# EAGLE board Motor (EAGLE 7.2.0)
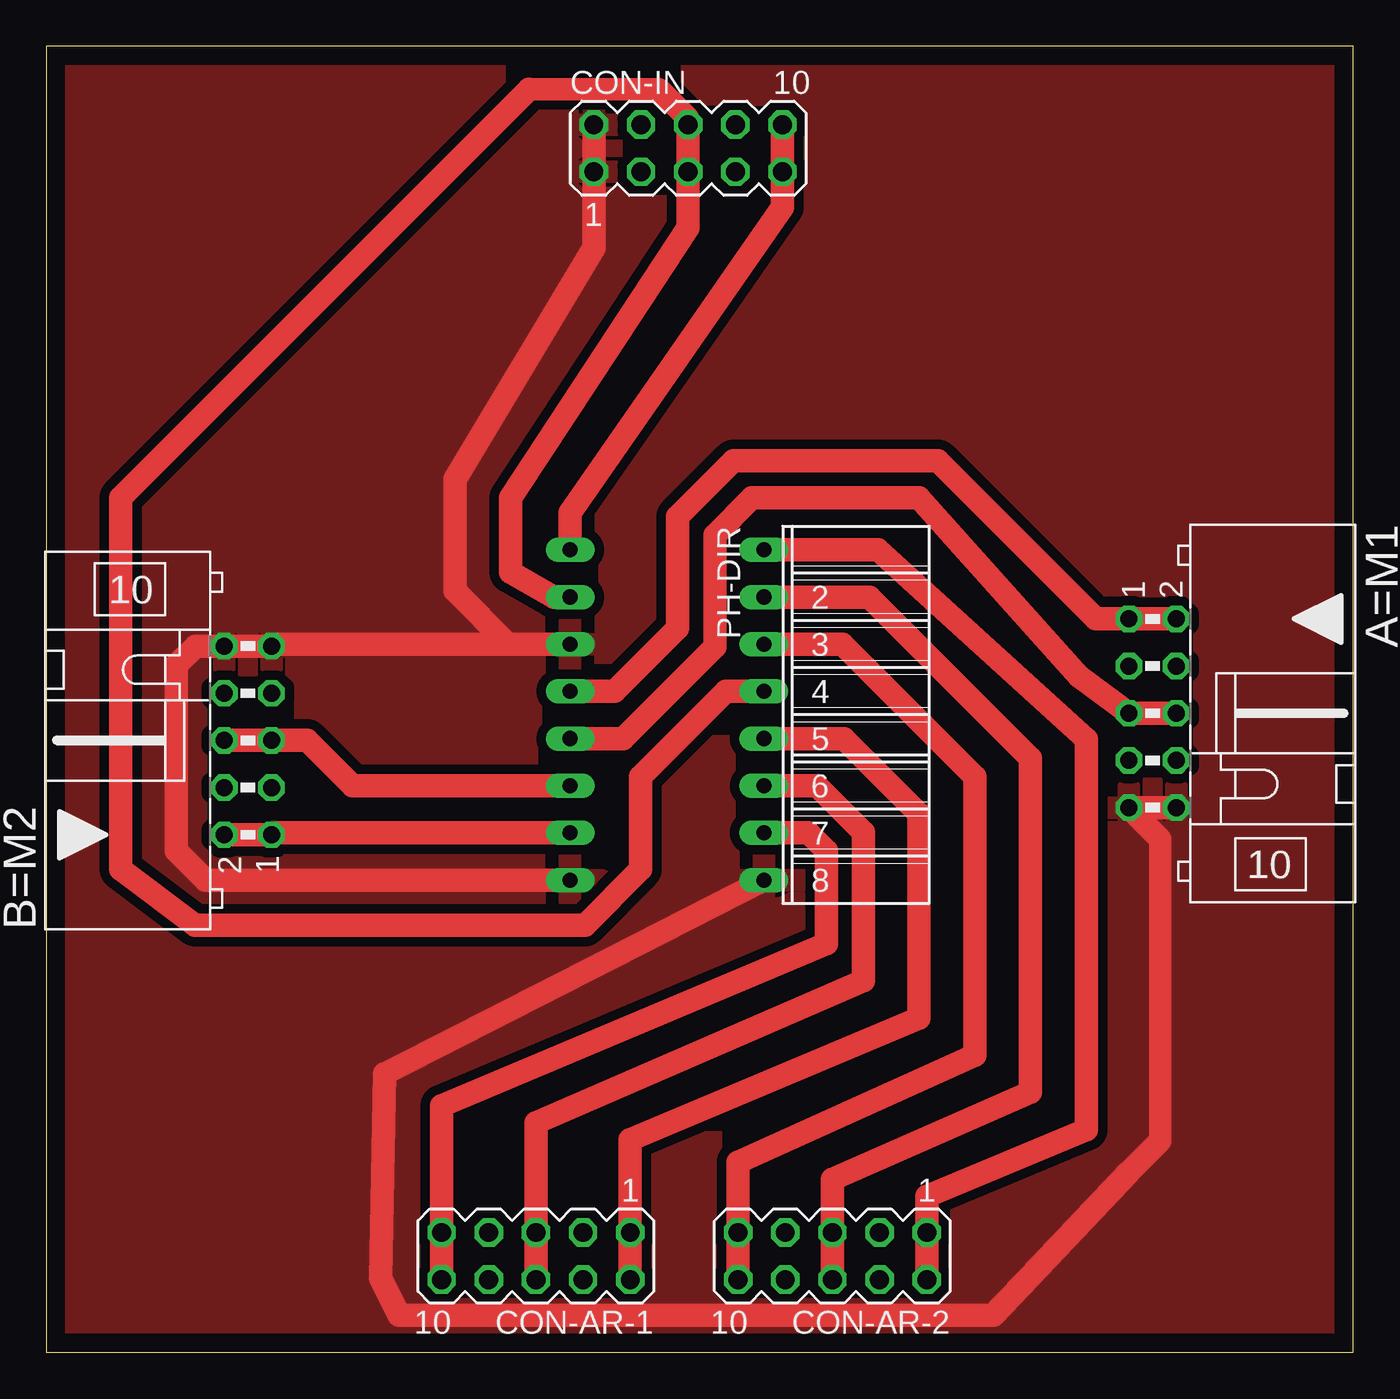
[diagram p0: board, top side]
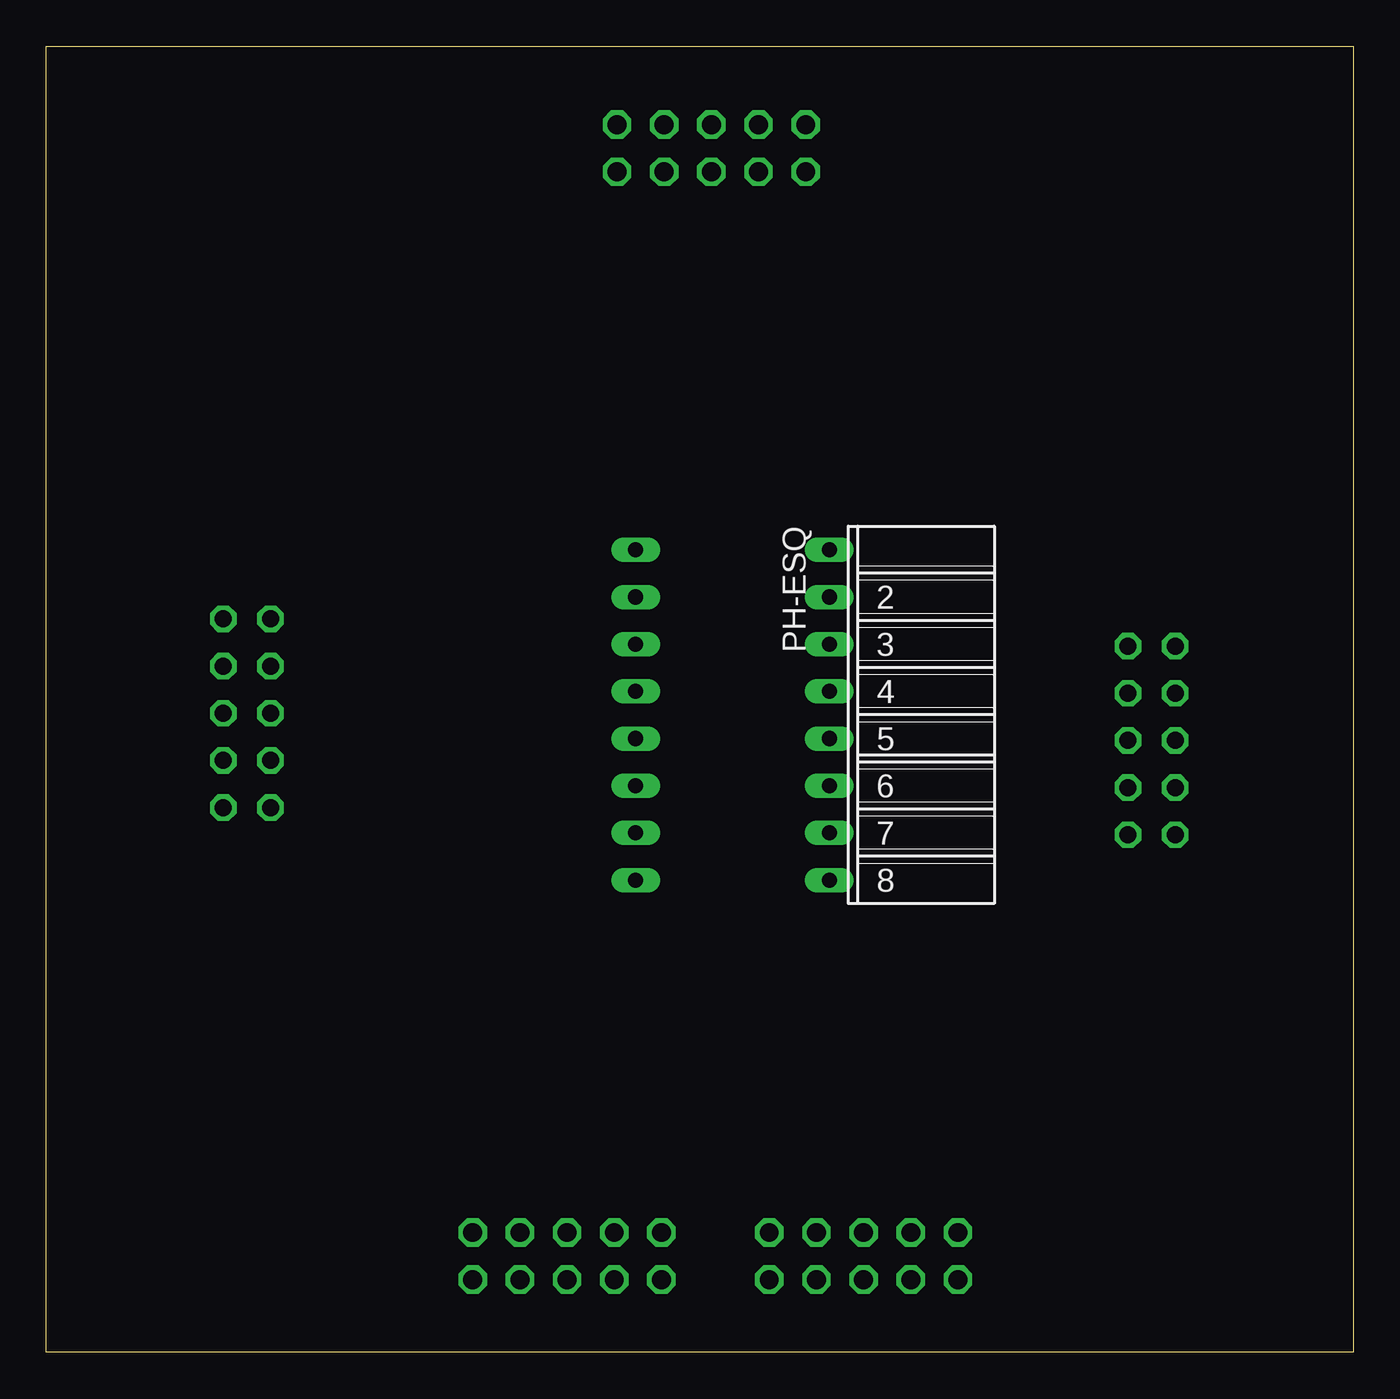
[diagram p1: board, bottom side, seen from below]

Size 70.37 x 70.31 mm. Coordinates in mm from the lower left corner, seen from the top.
Outline: 0,0 70.37,0 70.37,70.31 0,70.31 0,0
Copper layers (1*16): Top 0.035mm / dielectric 1.5mm / Bottom 0.035mm
Design rules "default *": minimum track width 6mil, minimum drill 0.35mm, track to track 20mil, track to pad 20mil, pad to pad 20mil, via to via 20mil, smd to smd 20mil, copper to edge 40mil, drill to drill 6mil, minimum pad ring 10mil, minimum via ring 8mil, stop-mask expansion 4mil, vias tented up to drill 0mil, thermal gap 10mil

## Footprints (pad centres in the part's own frame; a part is rotated, then mirrored left to right if it is on the bottom)
ML10L = drill 0.914 octagon: 1 -5.08,-1.27; 2 -5.08,1.27; 3 -2.54,-1.27; 4 -2.54,1.27; 5 0,-1.27; 6 0,1.27; 7 2.54,-1.27; 8 2.54,1.27; 9 5.08,-1.27; 10 5.08,1.27
MA05-2 = drill 1.016 octagon: 1 -5.08,-1.27; 2 -5.08,1.27; 3 -2.54,-1.27; 4 -2.54,1.27; 5 0,-1.27; 6 0,1.27; 7 2.54,-1.27; 8 2.54,1.27; 9 5.08,-1.27; 10 5.08,1.27
FE08W = drill 0.813 long: 1 -8.89,0; 2 -6.35,0; 3 -3.81,0; 4 -1.27,0; 5 1.27,0; 6 3.81,0; 7 6.35,0; 8 8.89,0

## Placement (x,y rotation side)
A=M1  [ML10L]  59.57,34.41 270 top
B=M2  [ML10L]  10.85,32.95 90 top
CON-AR-1  [MA05-2]  26.36,5.19 180 top
CON-AR-2  [MA05-2]  42.33,5.19 180 top
CON-IN  [MA05-2]  34.56,64.83 0 top
PH-DIR  [FE08W]  38.64,34.32 270 top
PH-ESQ  [FE08W]  28.21,34.32 270 bottom

## Library data of the parts
A=M1 B=M2 = con-ml; OC_FARNELL: unknown; OC_NEWARK: unknown
CON-AR-1 CON-AR-2 CON-IN = con-lstb; OC_FARNELL: unknown; OC_NEWARK: unknown
PH-DIR PH-ESQ = con-lsta; OC_FARNELL: unknown; OC_NEWARK: unknown

## Nets
5V: CON-IN.5 CON-IN.6 PH-DIR.4 PH-ESQ.2
D5: CON-AR-2.1 CON-AR-2.2 PH-DIR.1
D6: CON-AR-1.9 CON-AR-1.10 PH-DIR.7
D7: CON-AR-1.5 CON-AR-1.6 PH-DIR.6
D8: CON-AR-1.1 CON-AR-1.2 PH-DIR.5
GND: A=M1.9 A=M1.10 B=M2.9 B=M2.10 CON-IN.1 CON-IN.2 PH-DIR.8 PH-ESQ.3 PH-ESQ.8
M1-1: A=M1.1 A=M1.2 PH-ESQ.4
M1-2: A=M1.5 A=M1.6 PH-ESQ.5
M2-1: B=M2.1 B=M2.2 PH-ESQ.7
M2-2: B=M2.5 B=M2.6 PH-ESQ.6
RX0: CON-AR-2.5 CON-AR-2.6 PH-DIR.2
TX1: CON-AR-2.9 CON-AR-2.10 PH-DIR.3
V0: CON-IN.9 CON-IN.10 PH-ESQ.1

## Tracks (layer width: path | path; a pad name or v marks a point on that pad's centre or on a via)
5V
  Top 1.2: 26,68 33,68 34.56,66.44 CON-IN.6
  Top 1.27: CON-IN.6 CON-IN.5 34.56,60.56 25,46 25,42 27.33,40.67 PH-ESQ.2 | PH-DIR.4 36.59,35.59 32,31 32,26 29,23 8,23 4,26 4,46 26,68
D5
  Top 1.27: CON-AR-2.2 CON-AR-2.1 47.41,8.41 56,12 56,33 44.79,43.21 PH-DIR.1
D6
  Top 1.27: CON-AR-1.10 CON-AR-1.9 21.28,13.28 42,22 42,27 41.03,27.97 PH-DIR.7
D7
  Top 1.27: CON-AR-1.6 CON-AR-1.5 26.36,12.36 44,20 44,28 41.49,30.51 PH-DIR.6
D8
  Top 1.27: CON-AR-1.2 CON-AR-1.1 31.44,11.44 47,18 47,29 42.95,33.05 PH-DIR.5
GND
  Top 1.2: A=M1.9 60,27.63 60,11.4 58.3,9.7
  Top 1.27: CON-IN.2 CON-IN.1 29.48,59.48 22,47 22,41 24.87,38.13 PH-ESQ.3 12.22,38.13 B=M2.9 B=M2.10 8.03,38.03 7,37 7,27 8.57,25.43 PH-ESQ.8 | A=M1.10 A=M1.9 | PH-DIR.8 18.21,15 18,4 19,2 51,2 58.3,9.7
  pour Top: 0,0 70,0 70,70 0,70
M1-1
  Top 1.27: A=M1.2 A=M1.1 56.51,39.49 48,48 37,48 34,45 34,39 30.59,35.59 PH-ESQ.4
M1-2
  Top 1.27: A=M1.6 A=M1.5 55.59,36.41 47,46 38,46 36,44 36,38 31.05,33.05 PH-ESQ.5
M2-1
  Top 1.27: B=M2.2 B=M2.1 12.22,27.97 PH-ESQ.7
M2-2
  Top 1.27: PH-ESQ.6 16.49,30.51 14.05,32.95 B=M2.5 B=M2.6
RX0
  Top 1.27: CON-AR-2.6 CON-AR-2.5 42.33,9.33 53,14 53,32 44.33,40.67 PH-DIR.2
TX1
  Top 1.27: CON-AR-2.10 CON-AR-2.9 37.25,10.25 50,16 50,31 42.87,38.13 PH-DIR.3
V0
  Top 1.27: CON-IN.10 CON-IN.9 39.64,61.64 28.21,45.21 PH-ESQ.1